# Altium PCB mother.PcbDoc
Units mm, origin at the board's own origin, x right, y up, seen from the top; angles counter-clockwise.
Board outline 232.5 x 170.6 mm, 2 copper layers (Top Layer, Bottom Layer); 95 components, 49 nets, 567 pads, 0 vias.
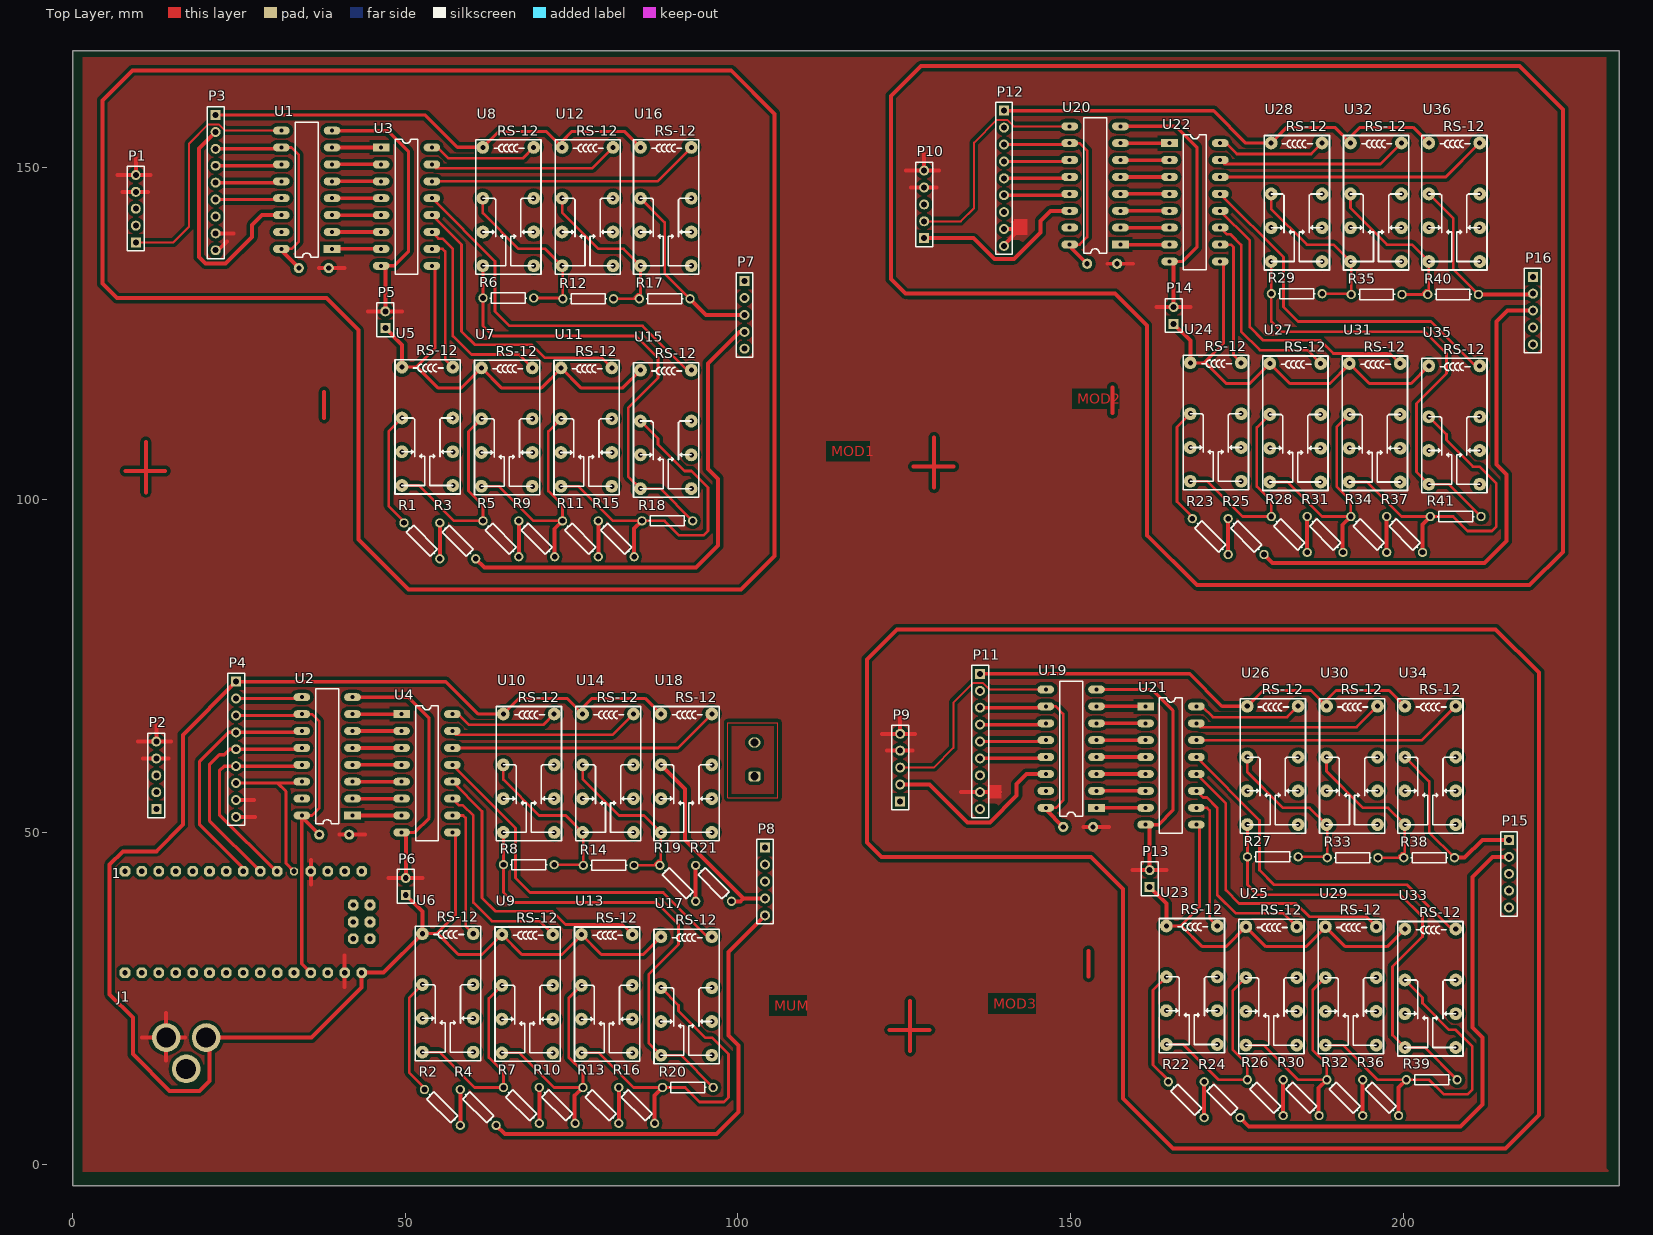
[diagram p0: Top Layer view]
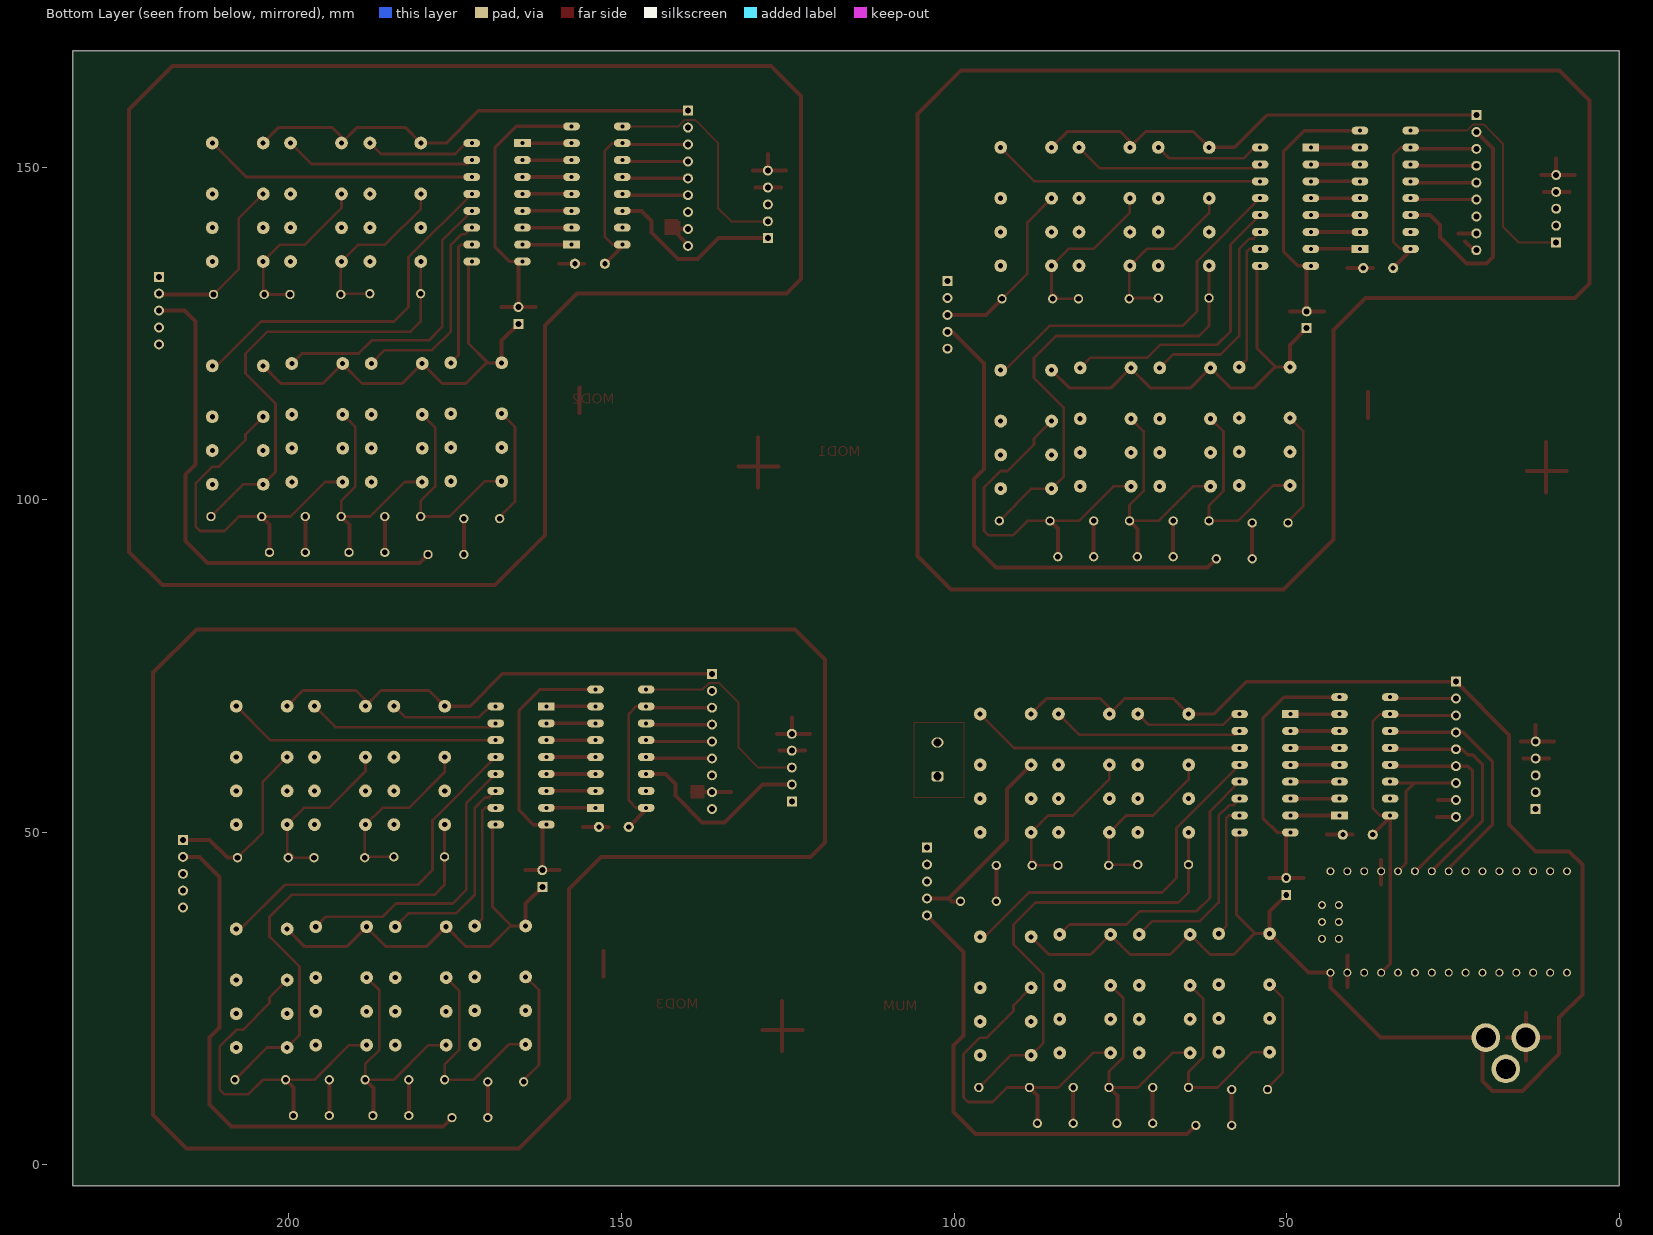
[diagram p1: Bottom Layer view, seen from below]

## Layer stack, top to bottom
Top Solder: solder mask 0.0102, Solder Resist, Dk 3.5
Top Layer: signal copper 0.0356
Dielectric 1: dielectric 0.32, FR-4, Dk 4.8
Bottom Layer: signal copper 0.0356
Bottom Solder: solder mask 0.0102, Solder Resist, Dk 3.5

## Board outline
0,-3.1 232.5,-3.1 232.5,167.5 0,167.5

## Design rules (kind name [scope] priority, off if disabled: settings)
Clearance Clearance_4 [InNamedPolygon('12VGND_L01_P000')] p1: gap=0.5 ignorepadtopadclearanceinfootprint=FALSE except(0: Arc-Hole Track-Hole SMDPad-Hole THPad-Hole Via-Hole Fill-Hole Poly-Hole Region-Hole Text-Hole)
Clearance Clearance_3 [InNamedPolygon('12VGND_L01_P000')] p2: gap=0.39 ignorepadtopadclearanceinfootprint=FALSE except(0: Arc-Hole Track-Hole SMDPad-Hole THPad-Hole Via-Hole Fill-Hole Poly-Hole Region-Hole Text-Hole)
Clearance Clearance_2 [InNamedPolygon('12VGND_L01_P000')] p3: gap=0.38 ignorepadtopadclearanceinfootprint=FALSE except(0: Arc-Hole Track-Hole SMDPad-Hole THPad-Hole Via-Hole Fill-Hole Poly-Hole Region-Hole Text-Hole)
Clearance Clearance_1 [InNamedPolygon('Top Layer-No Net 4')] p4: gap=0.35 ignorepadtopadclearanceinfootprint=FALSE except(0: Arc-Hole Track-Hole SMDPad-Hole THPad-Hole Via-Hole Fill-Hole Poly-Hole Region-Hole Text-Hole)
Clearance widePoLY [InNamedPolygon('12VGND_L01_P000')] p5: gap=0.35 ignorepadtopadclearanceinfootprint=FALSE except(0: Arc-Hole Track-Hole SMDPad-Hole THPad-Hole Via-Hole Fill-Hole Poly-Hole Region-Hole Text-Hole)
Clearance [All] p6: gap=0.254 ignorepadtopadclearanceinfootprint=FALSE except(0: Arc-Hole Track-Hole SMDPad-Hole THPad-Hole Via-Hole Fill-Hole Poly-Hole Region-Hole Text-Hole)
PolygonConnect [All] p1: connectstyle=Relief reliefconductorwidth=0.254 reliefentries=4 polygonreliefangle="90 Angle" airgapwidth=0.254
RoutingVias [All] p1: holewidth=0.711 width=1.27 viastyle="Through Hole" minholewidth=0.711 minwidth=1.27 maxholewidth=0.711 maxwidth=1.27
SolderMaskExpansion [All] p1: expansion=0.102
Width [All] p1: maxlimit=0.6 minlimit=0.128 preferedwidth=0.254 bottomlayer_minwidth=0.254 bottomlayer_maxwidth=0.254 minimp=50.000000 maximp=50.000000 favimp=50.000000
30 further rules are at their usual default settings.

## Components (designator, comment, footprint, x,y, rotation, side; value= is the part's Value field where it differs from the comment)
1 "Arduino Nano" NANO 34.548,39.065 r90 top
J1 "" POWER_JACK_PTH 6.378,19.145 r270 top
P1 "Header 5" HDR1X5 9.5,138.65 r90 top (schematic designator P5)
P2 "Header 5" HDR1X5 12.578,53.485 r90 top (schematic designator P8)
P3 "Header 9" HDR1X9 21.5,157.81 r270 top (schematic designator P4)
P4 "Header 9" HDR1X9 24.578,72.645 r270 top (schematic designator P1)
P5 "Header 2" HDR1X2 47,125.77 r90 top (schematic designator P7)
P6 "Header 2" HDR1X2 50.078,40.605 r90 top (schematic designator P3)
P7 "Header 5" HDR1X5 101,132.85 r270 top (schematic designator P6)
P8 "Header 5" HDR1X5 104.078,47.685 r270 top (schematic designator P2)
P9 "Header 5" HDR1X5 124.4,54.65 r90 top (schematic designator P5)
P10 "Header 5" HDR1X5 128,139.3 r90 top (schematic designator P5)
P11 "Header 9" HDR1X9 136.4,73.81 r270 top (schematic designator P4)
P12 "Header 9" HDR1X9 140,158.46 r270 top (schematic designator P4)
P13 "Header 2" HDR1X2 161.9,41.77 r90 top (schematic designator P7)
P14 "Header 2" HDR1X2 165.5,126.42 r90 top (schematic designator P7)
P15 "Header 5" HDR1X5 215.9,48.85 r270 top (schematic designator P6)
P16 "Header 5" HDR1X5 219.5,133.5 r270 top (schematic designator P6)
R1 "Res1" AXIAL-0.3 52.5,93.81 r315 top value=1K
R2 "Res1" AXIAL-0.3 55.578,8.645 r315 top value=1K (schematic designator R1)
R3 "Res1" AXIAL-0.3 57.888,93.81 r315 top value=1K (schematic designator R1)
R4 "Res1" AXIAL-0.3 60.966,8.645 r315 top value=1K (schematic designator R1)
R5 "Res1" AXIAL-0.3 64.375,94.116 r315 top value=1K (schematic designator R1)
R6 "Res1" AXIAL-0.3 65.5,130.31 r180 top value=1K (schematic designator R14)
R7 "Res1" AXIAL-0.3 67.454,8.951 r315 top value=1K (schematic designator R1)
R8 "Res1" AXIAL-0.3 68.578,45.145 r180 top value=1K (schematic designator R7)
R9 "Res1" AXIAL-0.3 69.764,94.116 r315 top value=1K (schematic designator R1)
R10 "Res1" AXIAL-0.3 72.842,8.951 r315 top value=1K (schematic designator R1)
R11 "Res1" AXIAL-0.3 76.325,94.116 r315 top value=1K (schematic designator R1)
R12 "Res1" AXIAL-0.3 77.5,130.19 r180 top value=1K (schematic designator R13)
R13 "Res1" AXIAL-0.3 79.404,8.951 r315 top value=1K (schematic designator R1)
R14 "Res1" AXIAL-0.3 80.578,45.025 r180 top value=1K (schematic designator R6)
R15 "Res1" AXIAL-0.3 81.714,94.116 r315 top value=1K (schematic designator R1)
R16 "Res1" AXIAL-0.3 84.792,8.951 r315 top value=1K (schematic designator R1)
R17 "Res1" AXIAL-0.3 89,130.19 r180 top value=1K (schematic designator R12)
R18 "Res1" AXIAL-0.3 89.391,96.81 r0 top value=1K (schematic designator R4)
R19 "Res1" AXIAL-0.3 90.962,42.331 r315 top value=1K (schematic designator R1)
R20 "Res1" AXIAL-0.3 92.47,11.645 r0 top value=1K (schematic designator R4)
R21 "Res1" AXIAL-0.3 96.35,42.331 r315 top value=1K (schematic designator R1)
R22 "Res1" AXIAL-0.3 167.4,9.81 r315 top value=1K (schematic designator R1)
R23 "Res1" AXIAL-0.3 171,94.46 r315 top value=1K (schematic designator R1)
R24 "Res1" AXIAL-0.3 172.788,9.81 r315 top value=1K (schematic designator R1)
R25 "Res1" AXIAL-0.3 176.388,94.46 r315 top value=1K (schematic designator R1)
R26 "Res1" AXIAL-0.3 179.275,10.116 r315 top value=1K (schematic designator R1)
R27 "Res1" AXIAL-0.3 180.4,46.31 r180 top value=1K (schematic designator R14)
R28 "Res1" AXIAL-0.3 182.875,94.766 r315 top value=1K (schematic designator R1)
R29 "Res1" AXIAL-0.3 184,130.96 r180 top value=1K (schematic designator R14)
R30 "Res1" AXIAL-0.3 184.664,10.116 r315 top value=1K (schematic designator R1)
R31 "Res1" AXIAL-0.3 188.264,94.766 r315 top value=1K (schematic designator R1)
R32 "Res1" AXIAL-0.3 191.225,10.116 r315 top value=1K (schematic designator R1)
R33 "Res1" AXIAL-0.3 192.4,46.19 r180 top value=1K (schematic designator R13)
R34 "Res1" AXIAL-0.3 194.825,94.766 r315 top value=1K (schematic designator R1)
R35 "Res1" AXIAL-0.3 196,130.84 r180 top value=1K (schematic designator R13)
R36 "Res1" AXIAL-0.3 196.614,10.116 r315 top value=1K (schematic designator R1)
R37 "Res1" AXIAL-0.3 200.214,94.766 r315 top value=1K (schematic designator R1)
R38 "Res1" AXIAL-0.3 203.9,46.19 r180 top value=1K (schematic designator R12)
R39 "Res1" AXIAL-0.3 204.291,12.81 r0 top value=1K (schematic designator R4)
R40 "Res1" AXIAL-0.3 207.5,130.84 r180 top value=1K (schematic designator R12)
R41 "Res1" AXIAL-0.3 207.891,97.46 r0 top value=1K (schematic designator R4)
U1 "74HC595" DIP16 39,137.69 r180 top (schematic designator U11)
U2 "74HC595" DIP16 42.078,52.525 r180 top (schematic designator U1)
U3 "ULN2003" DIP16 46.38,152.93 r0 top (schematic designator U10)
U4 "ULN2003" DIP16 49.458,67.765 r0 top (schematic designator U2)
U5 "RS12L" RS-12 48.45,121.045 r0 top (schematic designator U12)
U6 "RS12L" RS-12 51.528,35.88 r0 top (schematic designator U3)
U7 "RS12L" RS-12 60.4,120.935 r0 top (schematic designator U13)
U8 "RS12L" RS-12 60.61,154.08 r0 top (schematic designator U16)
U9 "RS12L" RS-12 63.478,35.77 r0 top (schematic designator U4)
U10 "RS12L" RS-12 63.688,68.915 r0 top (schematic designator U7)
U11 "RS12L" RS-12 72.35,120.935 r0 top (schematic designator U14)
U12 "RS12L" RS-12 72.531,154.08 r0 top (schematic designator U17)
U13 "RS12L" RS-12 75.428,35.77 r0 top (schematic designator U5)
U14 "RS12L" RS-12 75.61,68.915 r0 top (schematic designator U8)
U15 "RS12L" RS-12 84.3,120.585 r0 top
U16 "RS12L" RS-12 84.3,154.08 r0 top (schematic designator U18)
U17 "RS12L" RS-12 87.378,35.42 r0 top (schematic designator U6)
U18 "RS12L" RS-12 87.378,68.915 r0 top (schematic designator U9)
U19 "74HC595" DIP16 153.9,53.69 r180 top (schematic designator U11)
U20 "74HC595" DIP16 157.5,138.34 r180 top (schematic designator U11)
U21 "ULN2003" DIP16 161.28,68.93 r0 top (schematic designator U10)
U22 "ULN2003" DIP16 164.88,153.58 r0 top (schematic designator U10)
U23 "RS12L" RS-12 163.35,37.045 r0 top (schematic designator U12)
U24 "RS12L" RS-12 166.95,121.695 r0 top (schematic designator U12)
U25 "RS12L" RS-12 175.3,36.935 r0 top (schematic designator U13)
U26 "RS12L" RS-12 175.51,70.08 r0 top (schematic designator U16)
U27 "RS12L" RS-12 178.9,121.585 r0 top (schematic designator U13)
U28 "RS12L" RS-12 179.11,154.73 r0 top (schematic designator U16)
U29 "RS12L" RS-12 187.25,36.935 r0 top (schematic designator U14)
U30 "RS12L" RS-12 187.431,70.08 r0 top (schematic designator U17)
U31 "RS12L" RS-12 190.85,121.585 r0 top (schematic designator U14)
U32 "RS12L" RS-12 191.031,154.73 r0 top (schematic designator U17)
U33 "RS12L" RS-12 199.2,36.585 r0 top (schematic designator U15)
U34 "RS12L" RS-12 199.2,70.08 r0 top (schematic designator U18)
U35 "RS12L" RS-12 202.8,121.235 r0 top (schematic designator U15)
U36 "RS12L" RS-12 202.8,154.73 r0 top (schematic designator U18)

## Footprints (in the part's own frame and the unit in brackets; to place one, negate y for a bottom-side part, rotate by r counter-clockwise, add the part's x,y. Pads: shape width x height; smd on the part's side, far side on the other; paste and mask are expansions set on the pad)
AXIAL-0.3 [mm] "Axial Device, Thru-Hole; 2 Leads; 0.3 in Pin Spacing"
  round 1.4 hole 0.85: 1(-3.81,0) 2(3.81,0)
  silkscreen extent -2.77,-0.76 2.77,0.76
DIP16 [mm]
  rect 2.5x1.2 hole 0.6: 1(0,0)
  oval 2.5x1.2 hole 0.6: 2(0,-2.54) 3(0,-5.08) 4(0,-7.62) 5(0,-10.16) 6(0,-12.7) 7(0,-15.24) 8(0,-17.78) 9(7.62,-17.78) 10(7.62,-15.24) 11(7.62,-12.7) 12(7.62,-10.16) 13(7.62,-7.62) 14(7.62,-5.08) 15(7.62,-2.54) 16(7.62,0)
  silkscreen extent 2.08,-19.05 5.54,1.27
HDR1X2 [mm] "Connector; Header; 2 Position"
  rect 1.5x1.5 hole 0.9: 1(0,0)
  round 1.5 hole 0.9: 2(2.54,0)
  silkscreen extent -1.27,-1.27 3.81,1.27
HDR1X5 [mm] "Connector; Header; 5 Position"
  rect 1.5x1.5 hole 0.9: 1(0,0)
  round 1.5 hole 0.9: 2(2.54,0) 3(5.08,0) 4(7.62,0) 5(10.16,0)
  silkscreen extent -1.27,-1.27 11.43,1.27
HDR1X9 [mm] "Connector; Header; 9 Position"
  rect 1.5x1.5 hole 0.9: 1(0,0)
  round 1.5 hole 0.9: 2(2.54,0) 3(5.08,0) 4(7.62,0) 5(10.16,0) 6(12.7,0) 7(15.24,0) 8(17.78,0) 9(20.32,0)
  silkscreen extent -1.27,-1.27 21.59,1.27
NANO [mm]
  oct 1.6x1.6 / inner round 1.524 / far side round 1.2 hole 0.8: 3.3V(-10.16,24.13) 5V(-10.16,-1.27) A0(-10.16,19.05) A1(-10.16,16.51) A2(-10.16,13.97) A3(-10.16,11.43) A4(-10.16,8.89) A5(-10.16,6.35) A6(-10.16,3.81) A7(-10.16,1.27) AREF(-10.16,21.59) D3(5.08,3.81) D4(5.08,6.35) D5(5.08,8.89) D6(5.08,11.43) D7(5.08,13.97) D8(5.08,16.51) D9(5.08,19.05) D10(5.08,21.59) D11(5.08,24.13) D12(5.08,26.67) D13(-10.16,26.67) GND(-10.16,-6.35) GND1(5.08,-1.27) ICSP1(-5.08,-10.16) ICSP2(-5.08,-7.62) ICSP3(-2.54,-10.16) ICSP4(-2.54,-7.62) ICSP5(0,-10.16) ICSP6(0,-7.62) RAW(-10.16,-8.89) RST(-10.16,-3.81) RST1(5.08,-3.81) RX1(5.08,-6.35) TX0(5.08,-8.89)
  oct 1.2x1.2 / inner round 1.524 / far side round 1.2 hole 0.8: D2(5.08,1.27)
POWER_JACK_PTH [mil]
  round 170 / inner round 60 / far side round 170 hole 118: GND(0,303.15) GNDBREAK(185.04,421.26) PWR(0,539.37)
RS-12 [mm]
  round 1.924 hole 0.762: 1(1.05,-1.125) 4(1.05,-8.775) 6(1.05,-13.85) 8(1.05,-18.925) 9(8.7,-18.925) 11(8.7,-13.85) 13(8.7,-8.775) 16(8.7,-1.125)
  silkscreen extent 0,-20.2 9.8,0, body extent 3.05,-2.79 3.05,-2.79, height 0.25

## Part data
1: library part NANO, DeviceSetName=NANO, GateName_1=G$1, LibraryName=Arduino-clone, Package=NANO, SymbolName_1=NANO
J1: library part POWER_JACK, Package=POWER_JACK_PTH, DeviceSetName=POWER_JACK, GateName_1=G$1, LibraryName=SparkFun-Connectors, PROD_ID=CONN-08197, SymbolName_1=POWERJACK
P1 P2 P7 P8 P9 P10 P15 P16: "Header, 5-Pin", LatestRevisionDate=17-Jul-2002, LatestRevisionNote="Re-released for DXP Platform.", Publisher="Altium Limited"
P3 P4 P11 P12: "Header, 9-Pin", LatestRevisionDate=17-Jul-2002, LatestRevisionNote="Re-released for DXP Platform.", Publisher="Altium Limited"
P5 P6 P13 P14: "Header, 2-Pin", LatestRevisionDate=17-Jul-2002, LatestRevisionNote="Re-released for DXP Platform.", Publisher="Altium Limited"
R1 R2 R3 R4 R5 R6 R7 R8 R9 R10 R11 R12 R13 R14 R15 R16 R17 R18 R19 R20 R21 R22 R23 R24 R25 R26 R27 R28 R29 R30 R31 R32 R33 R34 R35 R36 R37 R38 R39 R40 R41: "Resistor", LatestRevisionDate=17-Jul-2002, LatestRevisionNote="Re-released for DXP Platform.", PackageDescription="Axial Device, Thru-Hole; 2 Leads; 0.3 in Pin Spacing", PackageReference=AXIAL-0.3, Published=8-Jun-2000, Publisher="Altium Limited"

## Free pads (board coordinates)
  round 1.524 hole 0.762: 17(34,134.81) 17(37.078,49.645) 17(148.9,50.81) 17(152.5,135.46) 18(38.5,134.81) 18(41.578,49.645) 18(153.4,50.81) 18(157,135.46)
  oval 1.824x1.524 hole 1.262: 19(102.5,63.5)
  rrect50% 1.824x1.524 hole 1.262: 20(102.5,58.415)

## Nets (pads, with @x,y where several pads share a name; then routed paths per layer and width w, separated by ;. In a path a pad name is that pad's centre, name@x,y a point inside that pad or via, vN(x,y) a via of type N, cw(c..) or ccw(c..) an arc to the next point about the centre after c; other vN are vias at no path point)
5V: 
12V: 
12VGND: 
CLK: 
DATA: 
DAUG1Q*: 
DAUG2Q*: 
DAUG3Q*: 
EN: 
LATCH: 
MUMQ*: 
NetR1_2: 
NetR2_2: 
NetR3_2: 
NetR4_2: 
NetR5_2: 
NetR6_2: 
NetR8_2: 
NetR9_2: 
NetR10_2: 
NetR11_2: 
NetR12_2: 
NetR13_2: 
NetU1_1: 
NetU1_2: 
NetU1_3: 
NetU1_4: 
NetU1_5: 
NetU1_6: 
NetU1_7: 
NetU10_1: 
NetU10_2: 
NetU10_3: 
NetU10_4: 
NetU10_5: 
NetU10_6: 
NetU10_7: 
T1: 
T2: 
T3: 
T4: 
T5: 
T6: 
T7: 
TERMA: 
TERMB: 
TERMC: 
TERMD: 
TERME: 
pads on no net: 1.3.3V 1.5V 1.A0 1.A1 1.A2 1.A3 1.A4 1.A5 1.A6 1.A7 1.AREF 1.D2 1.D3 1.D4 1.D5 1.D6 1.D7 1.D8 1.D9 1.D10 1.D11 1.D12 1.D13 1.GND 1.GND1 1.ICSP1 1.ICSP2 1.ICSP3 1.ICSP4 1.ICSP5 1.ICSP6 1.RAW 1.RST 1.RST1 1.RX1 1.TX0 J1.GND J1.GNDBREAK J1.PWR P1.1 P1.2 P1.3 P1.4 P1.5 P2.1 P2.2 P2.3 P2.4 P2.5 P3.1 P3.2 P3.3 P3.4 P3.5 P3.6 P3.7 P3.8 P3.9 P4.1 P4.2 P4.3 P4.4 P4.5 P4.6 P4.7 P4.8 P4.9 P5.1 P5.2 P6.1 P6.2 P7.1 P7.2 P7.3 P7.4 P7.5 P8.1 P8.2 P8.3 P8.4 P8.5 P9.1 P9.2 P9.3 P9.4 P9.5 P10.1 P10.2 P10.3 P10.4 P10.5 P11.1 P11.2 P11.3 P11.4 P11.5 P11.6 P11.7 P11.8 P11.9 P12.1 P12.2 P12.3 P12.4 P12.5 P12.6 P12.7 P12.8 P12.9 P13.1 P13.2 P14.1 P14.2 P15.1 P15.2 P15.3 P15.4 P15.5 P16.1 P16.2 P16.3 P16.4 P16.5 R1.1 R1.2 R2.1 R2.2 R3.1 R3.2 R4.1 R4.2 R5.1 R5.2 R6.1 R6.2 R7.1 R7.2 R8.1 R8.2 R9.1 R9.2 R10.1 R10.2 R11.1 R11.2 R12.1 R12.2 R13.1 R13.2 R14.1 R14.2 R15.1 R15.2 R16.1 R16.2 R17.1 R17.2 R18.1 R18.2 R19.1 R19.2 R20.1 R20.2 R21.1 R21.2 R22.1 R22.2 R23.1 R23.2 R24.1 R24.2 R25.1 R25.2 R26.1 R26.2 R27.1 R27.2 R28.1 R28.2 R29.1 R29.2 R30.1 R30.2 R31.1 R31.2 R32.1 R32.2 R33.1 R33.2 R34.1 R34.2 R35.1 R35.2 R36.1 R36.2 R37.1 R37.2 R38.1 R38.2 R39.1 R39.2 R40.1 R40.2 R41.1 R41.2 U1.1 U1.2 U1.3 U1.4 U1.5 U1.6 U1.7 U1.8 U1.9 U1.10 U1.11 U1.12 U1.13 U1.14 U1.15 U1.16 U2.1 U2.2 U2.3 U2.4 U2.5 U2.6 U2.7 U2.8 U2.9 U2.10 U2.11 U2.12 U2.13 U2.14 U2.15 U2.16 U3.1 U3.2 U3.3 U3.4 U3.5 U3.6 U3.7 U3.8 U3.9 U3.10 U3.11 U3.12 U3.13 U3.14 U3.15 U3.16 U4.1 U4.2 U4.3 U4.4 U4.5 U4.6 U4.7 U4.8 U4.9 U4.10 U4.11 U4.12 U4.13 U4.14 U4.15 U4.16 U5.1 U5.4 U5.6 U5.8 U5.9 U5.11 U5.13 U5.16 U6.1 U6.4 U6.6 U6.8 U6.9 U6.11 U6.13 U6.16 U7.1 U7.4 U7.6 U7.8 U7.9 U7.11 U7.13 U7.16 U8.1 U8.4 U8.6 U8.8 U8.9 U8.11 U8.13 U8.16 U9.1 U9.4 U9.6 U9.8 U9.9 U9.11 U9.13 U9.16 U10.1 U10.4 U10.6 U10.8 U10.9 U10.11 U10.13 U10.16 U11.1 U11.4 U11.6 U11.8 U11.9 U11.11 U11.13 U11.16 U12.1 U12.4 U12.6 U12.8 U12.9 U12.11 U12.13 U12.16 U13.1 U13.4 U13.6 U13.8 U13.9 U13.11 U13.13 U13.16 U14.1 U14.4 U14.6 U14.8 U14.9 U14.11 U14.13 U14.16 U15.1 U15.4 U15.6 U15.8 U15.9 U15.11 U15.13 U15.16 U16.1 U16.4 U16.6 U16.8 U16.9 U16.11 U16.13 U16.16 U17.1 U17.4 U17.6 U17.8 U17.9 U17.11 U17.13 U17.16 U18.1 U18.4 U18.6 U18.8 U18.9 U18.11 U18.13 U18.16 U19.1 U19.2 U19.3 U19.4 U19.5 U19.6 U19.7 U19.8 U19.9 U19.10 U19.11 U19.12 U19.13 U19.14 U19.15 U19.16 U20.1 U20.2 U20.3 U20.4 U20.5 U20.6 U20.7 U20.8 U20.9 U20.10 U20.11 U20.12 U20.13 U20.14 U20.15 U20.16 U21.1 U21.2 U21.3 U21.4 U21.5 U21.6 U21.7 U21.8 U21.9 U21.10 U21.11 U21.12 U21.13 U21.14 U21.15 U21.16 U22.1 U22.2 U22.3 U22.4 U22.5 U22.6 U22.7 U22.8 U22.9 U22.10 U22.11 U22.12 U22.13 U22.14 U22.15 U22.16 U23.1 U23.4 U23.6 U23.8 U23.9 U23.11 U23.13 U23.16 U24.1 U24.4 U24.6 U24.8 U24.9 U24.11 U24.13 U24.16 U25.1 U25.4 U25.6 U25.8 U25.9 U25.11 U25.13 U25.16 U26.1 U26.4 U26.6 U26.8 U26.9 U26.11 U26.13 U26.16 U27.1 U27.4 U27.6 U27.8 U27.9 U27.11 U27.13 U27.16 U28.1 U28.4 U28.6 U28.8 U28.9 U28.11 U28.13 U28.16 U29.1 U29.4 U29.6 U29.8 U29.9 U29.11 U29.13 U29.16 U30.1 U30.4 U30.6 U30.8 U30.9 U30.11 U30.13 U30.16 U31.1 U31.4 U31.6 U31.8 U31.9 U31.11 U31.13 U31.16 U32.1 U32.4 U32.6 U32.8 U32.9 U32.11 U32.13 U32.16 U33.1 U33.4 U33.6 U33.8 U33.9 U33.11 U33.13 U33.16 U34.1 U34.4 U34.6 U34.8 U34.9 U34.11 U34.13 U34.16 U35.1 U35.4 U35.6 U35.8 U35.9 U35.11 U35.13 U35.16 U36.1 U36.4 U36.6 U36.8 U36.9 U36.11 U36.13 U36.16
copper on no net: | length 5328.5
  Top Layer w0.125: 98.5,55.23 98.5,66.5 106,66.5 106,55.23 98.5,55.23
  Top Layer w0.3: 9.5,138.65 15.15,138.65 17.5,141 17.5,153.5 20.424,156.424 21.978,156.424 22.932,155.47 31.38,155.47 ; 124.4,59.73 129.44,59.73 132.4,62.69 132.4,69.5 135.324,72.424 136.878,72.424 137.832,71.47 146.28,71.47 ; 128,141.84 133.5,141.84 135.5,143.84 135.5,153.65 138.924,157.074 140.478,157.074 141.432,156.12 149.88,156.12
  Top Layer w0.4: 31.38,137.69 32.88,137.69 34,138.81 34,151.81 32.88,152.93 31.38,152.93 ; 34.378,67.685 34.458,67.765 35.958,67.765 37.078,66.645 37.078,53.645 35.958,52.525 34.458,52.525 ; 49.5,102.12 52.041,102.12 57.351,96.81 61.681,96.81 61.681,99.129 59.5,101.31 59.5,110.21 61.45,112.16 ; 49.5,112.27 47.5,110.27 47.5,99.041 49.731,96.81 ; 52.578,16.955 55.12,16.955 60.43,11.645 64.76,11.645 64.76,13.964 62.578,16.145 62.578,25.045 64.528,26.995 ; 52.578,27.105 50.578,25.105 50.578,13.876 52.81,11.645 ; 54,137.69 55.62,137.69 56,137.31 56,121.07 57.15,119.92 ; 54,140.23 55,139.23 55.58,139.23 57.15,137.66 57.15,124.61 59.95,121.81 67.1,121.81 69.1,119.81 ; 54,142.77 58.45,138.32 58.45,125.31 60.45,123.31 69,123.31 71,121.31 79.55,121.31 81.05,119.81 ; 54,145.31 63.5,135.81 63.5,128.31 65.69,126.12 85.69,126.12 92.35,119.46 ; 54,147.85 87.895,147.85 93,152.955 ; 54.58,149.81 78.086,149.81 81.231,152.955 ; 54.88,152.93 56.5,151.31 67.665,151.31 69.31,152.955 ; 57.078,52.525 58.698,52.525 59.078,52.145 59.078,35.905 60.228,34.755 ; 57.078,55.065 58.078,54.065 58.658,54.065 60.228,52.495 60.228,39.445 63.028,36.645 70.178,36.645 72.178,34.645 ; 57.078,57.605 61.528,53.155 61.528,40.145 63.528,38.145 72.078,38.145 74.078,36.145 82.628,36.145 84.128,34.645 ; 57.078,60.145 66.578,50.645 66.578,43.145 68.768,40.955 88.768,40.955 95.428,34.295 96.078,34.295 ; 57.078,62.685 90.973,62.685 96.078,67.79 ; 57.078,65.225 57.658,64.645 81.165,64.645 84.31,67.79 ; 57.078,67.765 57.958,67.765 59.578,66.145 70.743,66.145 72.388,67.79 ; 61.45,102.01 64.101,102.01 69.301,96.81 73.631,96.81 73.631,99.179 71.5,101.31 71.5,110.26 73.4,112.16 ; 61.66,145.305 61.66,143.07 67.04,137.69 71.046,137.69 73.581,135.155 ; 61.69,134.266 61.69,130.31 61.69,126.12 63.2,124.61 84.7,124.61 88,121.31 88,118.31 83.5,113.81 83.5,103.51 85.35,101.66 88.351,101.66 93.201,96.81 ; 64.528,16.845 67.18,16.845 72.38,11.645 76.71,11.645 76.71,14.014 74.578,16.145 74.578,25.095 76.478,26.995 ; 64.738,49.101 64.768,49.101 64.768,45.145 64.768,40.955 66.278,39.445 87.778,39.445 91.078,36.145 91.078,33.145 86.578,28.645 86.578,18.345 88.428,16.495 91.43,16.495 96.28,11.645 ; 64.738,60.14 64.738,57.905 70.118,52.525 74.125,52.525 76.66,49.99 76.768,49.881 76.768,45.025 76.648,45.145 72.388,45.145 ; 69.31,130.31 73.57,130.31 ; 73.4,102.01 76.051,102.01 81.251,96.81 85.581,96.81 89,96.81 91.177,94.633 94.823,94.633 95.5,95.31 95.5,101.81 ; 73.581,145.305 73.581,143.179 79.07,137.69 82.815,137.69 85.35,135.155 85.35,130.963 85.231,130.844 ; 73.69,130.19 73.69,135.046 ; 76.478,16.845 79.13,16.845 84.33,11.645 88.66,11.645 92.078,11.645 94.255,9.468 97.901,9.468 98.578,10.145 98.578,16.645 96.078,19.145 95.078,19.145 91.078,23.145 91.078,23.995 88.428,26.645 ; 76.66,60.14 76.66,58.014 82.148,52.525 85.893,52.525 88.428,49.99 88.428,45.798 88.31,45.679 ; 81.31,130.19 84.536,130.19 ; 84.388,45.025 87.614,45.025 87.614,45.296 87.997,45.679 88.268,45.679 ; 84.536,130.461 84.919,130.844 85.19,130.844 ; 85.35,111.81 88,109.16 88,108.31 92,104.31 93,104.31 95.5,101.81 ; 85.35,145.305 89,141.655 89,134 92.81,130.19 ; 88.268,45.025 88.31,45.025 ; 95.5,95.81 95.5,101.81 ; 146.28,53.69 147.78,53.69 148.9,54.81 148.9,67.81 147.78,68.93 146.28,68.93 ; 149.88,138.34 151.38,138.34 152.5,139.46 152.5,152.46 151.38,153.58 149.88,153.58 ; 164.4,18.12 166.941,18.12 172.251,12.81 176.581,12.81 176.581,15.129 174.4,17.31 174.4,26.21 176.35,28.16 ; 164.4,28.27 162.4,26.27 162.4,15.041 164.631,12.81 ; 168,102.77 170.541,102.77 175.851,97.46 180.181,97.46 180.181,99.779 178,101.96 178,110.86 179.95,112.81 ; 168,112.92 166,110.92 166,99.691 168.231,97.46 ; 168.9,53.69 170.52,53.69 170.9,53.31 170.9,37.07 172.05,35.92 ; 168.9,56.23 169.9,55.23 170.48,55.23 172.05,53.66 172.05,40.61 174.85,37.81 182,37.81 184,35.81 ; 168.9,58.77 173.35,54.32 173.35,41.31 175.35,39.31 183.9,39.31 185.9,37.31 194.45,37.31 195.95,35.81 ; 168.9,61.31 178.4,51.81 178.4,44.31 180.59,42.12 200.59,42.12 207.25,35.46 ; 168.9,63.85 202.795,63.85 207.9,68.955 ; 169.48,65.81 192.986,65.81 196.131,68.955 ; 169.78,68.93 171.4,67.31 182.565,67.31 184.21,68.955 ; 172.5,138.34 174.12,138.34 174.5,137.96 174.5,121.72 175.65,120.57 ; 172.5,140.88 173.5,139.88 174.08,139.88 175.65,138.31 175.65,125.26 178.45,122.46 185.6,122.46 187.6,120.46 ; 172.5,143.42 176.95,138.97 176.95,125.96 178.95,123.96 187.5,123.96 189.5,121.96 198.05,121.96 199.55,120.46 ; 172.5,145.96 182,136.46 182,128.96 184.19,126.77 204.19,126.77 210.85,120.11 ; 172.5,148.5 206.395,148.5 211.5,153.605 ; 173.08,150.46 196.586,150.46 199.731,153.605 ; 173.38,153.58 175,151.96 186.165,151.96 187.81,153.605 ; 176.35,18.01 179.001,18.01 184.201,12.81 188.531,12.81 188.531,15.179 186.4,17.31 186.4,26.26 188.3,28.16 ; 176.56,61.305 176.56,59.07 181.94,53.69 185.946,53.69 188.481,51.155 ; 176.59,50.266 176.59,46.31 176.59,42.12 178.1,40.61 199.6,40.61 202.9,37.31 202.9,34.31 198.4,29.81 198.4,19.51 200.25,17.66 203.251,17.66 208.101,12.81 ; 179.95,102.66 182.601,102.66 187.801,97.46 192.131,97.46 192.131,99.829 190,101.96 190,110.91 191.9,112.81 ; 180.16,145.955 180.16,143.72 185.54,138.34 189.546,138.34 192.081,135.805 ; 180.19,134.916 180.19,130.96 180.19,126.77 181.7,125.26 203.2,125.26 206.5,121.96 206.5,118.96 202,114.46 202,104.16 203.85,102.31 206.851,102.31 211.701,97.46 ; 184.21,46.31 188.47,46.31 ; 187.81,130.96 192.07,130.96 ; 188.3,18.01 190.951,18.01 196.151,12.81 200.481,12.81 203.9,12.81 206.077,10.633 209.723,10.633 210.4,11.31 210.4,17.81 207.9,20.31 206.9,20.31 202.9,24.31 202.9,25.16 200.25,27.81 ; 188.481,61.305 188.481,59.179 193.97,53.69 197.715,53.69 200.25,51.155 200.25,46.963 200.131,46.844 ; 188.59,46.19 188.59,51.046 ; 191.9,102.66 194.551,102.66 199.751,97.46 204.081,97.46 207.5,97.46 209.677,95.283 213.323,95.283 214,95.96 214,102.46 211.5,104.96 210.5,104.96 206.5,108.96 206.5,109.81 203.85,112.46 ; 192.081,145.955 192.081,143.829 197.57,138.34 201.315,138.34 203.85,135.805 203.85,131.613 203.731,131.494 ; 192.19,130.84 192.19,135.696 ; 196.21,46.19 199.436,46.19 ; 199.436,46.461 199.819,46.844 200.09,46.844 ; 199.81,130.84 203.036,130.84 ; 200.25,61.305 203.9,57.655 203.9,50 207.71,46.19 ; 203.036,131.111 203.419,131.494 203.69,131.494 ; 203.85,145.955 207.5,142.305 207.5,134.65 211.31,130.84
  Top Layer w0.45: 49.5,119.92 51.61,119.92 54.5,122.81 54.5,134.65 ; 51.79,119.92 54.9,116.81 58.45,116.81 61.45,119.81 64.45,116.81 70.5,116.81 73.4,119.71 ; 52.578,34.755 54.688,34.755 ; 57.078,49.985 57.578,49.485 57.578,37.645 54.688,34.755 ; 61.66,152.955 64.015,155.31 71.226,155.31 73.581,152.955 ; 64.738,67.79 67.093,70.145 74.305,70.145 76.66,67.79 76.66,68.726 78.078,70.145 86.073,70.145 88.428,67.79 ; 73.4,119.81 76.4,116.81 82.7,116.81 85.35,119.46 ; 73.581,153.891 75,155.31 82.995,155.31 85.35,152.955 ; 88.428,34.295 85.778,31.645 79.478,31.645 76.478,34.645 76.478,34.545 73.578,31.645 67.528,31.645 64.528,34.645 61.528,31.645 57.978,31.645 54.868,34.755 54.688,34.755 ; 164.4,35.92 166.51,35.92 169.4,38.81 169.4,50.65 ; 166.69,35.92 169.8,32.81 173.35,32.81 176.35,35.81 179.35,32.81 185.4,32.81 188.3,35.71 ; 168,120.57 170.11,120.57 173,123.46 173,135.3 ; 170.29,120.57 173.4,117.46 176.95,117.46 179.95,120.46 182.95,117.46 189,117.46 191.9,120.36 ; 176.56,68.955 178.915,71.31 186.126,71.31 188.481,68.955 ; 180.16,153.605 182.515,155.96 189.726,155.96 192.081,153.605 ; 188.3,35.81 191.3,32.81 197.6,32.81 200.25,35.46 ; 188.481,69.891 189.9,71.31 197.895,71.31 200.25,68.955 ; 191.9,120.46 194.9,117.46 201.2,117.46 203.85,120.11 ; 192.081,154.541 193.5,155.96 201.495,155.96 203.85,153.605
  Top Layer w0.5: 21.5,145.11 31.18,145.11 ; 21.5,147.65 31.18,147.65 ; 21.5,150.19 31.18,150.19 ; 21.5,152.73 31.18,152.73 ; 21.5,157.81 53,157.81 57.855,152.955 61.66,152.955 ; 24.578,57.405 30.818,57.405 ; 24.578,67.565 34.258,67.565 34.378,67.685 ; 24.578,70.105 34.258,70.105 34.458,70.305 ; 24.578,72.645 56.078,72.645 60.933,67.79 64.738,67.79 ; 25.658,44.145 25.658,44.565 19.078,51.145 19.078,60.645 23.458,65.025 24.578,65.025 34.258,65.025 34.378,65.145 ; 28.198,44.145 20.578,51.765 20.578,60.145 22.078,61.645 22.778,61.645 23.618,62.485 24.578,62.485 34.258,62.485 34.378,62.605 ; 30.738,44.145 30.578,44.145 22.078,52.645 22.078,59.245 22.778,59.945 24.578,59.945 34.258,59.945 34.378,60.065 ; 33.278,44.145 32.078,45.345 32.078,56.145 30.818,57.405 ; 34.378,57.525 34.258,57.405 30.818,57.405 ; 34.458,52.265 34.458,30.265 35.818,28.905 ; 39,155.47 47.34,155.47 50.5,152.31 50.5,137.31 48.34,135.15 46.38,135.15 ; 42.078,70.305 50.418,70.305 53.578,67.145 53.578,52.145 51.418,49.985 49.458,49.985 ; 136.4,61.11 146.08,61.11 ; 136.4,63.65 146.08,63.65 ; 136.4,66.19 146.08,66.19 ; 136.4,68.73 146.08,68.73 ; 136.4,73.81 167.9,73.81 172.755,68.955 176.56,68.955 ; 140,145.76 149.68,145.76 ; 140,148.3 149.68,148.3 ; 140,150.84 149.68,150.84 ; 140,153.38 149.68,153.38 ; 140,158.46 171.5,158.46 176.355,153.605 180.16,153.605 ; 153.9,71.47 162.24,71.47 165.4,68.31 165.4,53.31 163.24,51.15 161.28,51.15 ; 157.5,156.12 165.84,156.12 169,152.96 169,137.96 166.84,135.8 164.88,135.8
  Top Layer w0.55: 34.378,57.525 34.458,57.605 ; 34.378,60.065 34.458,60.145 ; 34.378,62.605 34.458,62.685 ; 34.378,65.145 34.458,65.225 ; 39,137.69 46.38,137.69 ; 39,140.23 46.38,140.23 ; 39,142.77 46.38,142.77 ; 39,145.31 46.38,145.31 ; 39,147.85 46.38,147.85 ; 39,150.39 46.38,150.39 ; 39,152.93 46.38,152.93 ; 42.078,52.525 49.458,52.525 ; 42.078,55.065 49.458,55.065 ; 42.078,57.605 49.458,57.605 ; 42.078,60.145 49.458,60.145 ; 42.078,62.685 49.458,62.685 ; 42.078,65.225 49.458,65.225 ; 42.078,67.765 49.458,67.765 ; 153.9,53.69 161.28,53.69 ; 153.9,56.23 161.28,56.23 ; 153.9,58.77 161.28,58.77 ; 153.9,61.31 161.28,61.31 ; 153.9,63.85 161.28,63.85 ; 153.9,66.39 161.28,66.39 ; 153.9,68.93 161.28,68.93 ; 157.5,138.34 164.88,138.34 ; 157.5,140.88 164.88,140.88 ; 157.5,143.42 164.88,143.42 ; 157.5,145.96 164.88,145.96 ; 157.5,148.5 164.88,148.5 ; 157.5,151.04 164.88,151.04 ; 157.5,153.58 164.88,153.58
  Top Layer w0.6: 6.69,130.31 4.5,132.5 4.5,160 9,164.5 99,164.5 105.5,158 105.5,91.5 100.5,86.5 50.5,86.5 43,94 43,125.5 38.19,130.31 7,130.31 ; 6.735,148.81 11.702,148.81 ; 7.497,146.27 9.5,146.27 11.347,146.27 ; 7.922,104.31 11,104.31 ; 9.5,148.81 9.5,151.291 ; 9.813,63.645 14.78,63.645 12.578,63.645 12.578,66.126 ; 10.418,19.145 14.078,19.145 ; 10.575,61.105 12.578,61.105 14.425,61.105 ; 11,101.106 11,104.31 ; 11,108.665 11,104.31 ; 13.922,104.31 11,104.31 ; 14.078,15.734 14.078,19.145 ; 14.078,22.862 14.078,19.145 ; 16.933,19.145 14.078,19.145 ; 20.078,19.145 20.578,19.145 ; 21.5,137.49 21.884,137.49 23.204,138.81 ; 21.5,140.03 24.222,140.03 ; 21.5,155.27 19,152.77 19,136.5 20,135.5 23,135.5 27,139.5 27,141.27 28.5,142.77 31.38,142.77 ; 24.578,52.325 27.415,52.325 ; 24.578,54.865 27.3,54.865 ; 24.578,72.645 16.578,64.645 16.578,51.145 12.578,47.145 7.578,47.145 5.578,45.145 5.578,25.645 9.078,22.145 9.078,16.645 14.578,11.145 19.078,11.145 20.578,12.645 20.578,19.145 ; 31.38,137.43 34,134.81 ; 34.458,52.525 34.458,52.265 37.078,49.645 ; 35.818,43.95 35.818,44.145 ; 35.818,44.512 35.818,44.145 ; 35.818,45.818 35.818,42.137 35.818,44.145 ; 37.038,134.81 38.5,134.81 40.869,134.81 ; 37.82,112.299 37.82,116.165 ; 40.116,49.645 41.578,49.645 43.947,49.645 ; 40.898,28.905 40.898,26.723 40.898,31.47 ; 44.422,128.31 47,128.31 ; 47,125.77 49.5,123.27 49.5,119.92 ; 47,134.53 47,128.31 ; 47.5,43.145 50.078,43.145 ; 49.458,49.985 50.078,49.365 50.078,43.145 ; 49.5,128.31 47,128.31 ; 50.078,40.605 52.578,38.105 52.578,34.755 46.728,28.905 43.438,28.905 43.438,26.645 35.938,19.145 20.578,19.145 ; 52.578,43.145 50.078,43.145 ; 55.194,91.116 55.194,96.504 ; 58.272,5.951 58.272,11.339 ; 60.582,91.116 61.888,89.81 93.694,89.81 97,93.116 97,94.633 ; 63.66,5.951 64.966,4.645 96.772,4.645 100.078,7.951 100.078,9.468 ; 67.07,91.422 67.07,96.81 ; 70.148,6.257 70.148,11.645 ; 72.4,91.48 72.4,95.579 73.631,96.81 ; 75.478,6.315 75.478,10.414 76.71,11.645 ; 79.02,91.422 79.02,96.81 ; 82.098,6.257 82.098,11.645 ; 84.408,91.422 84.408,95.636 85.581,96.81 ; 87.486,6.257 87.486,10.471 88.66,11.645 ; 88.428,60.14 92.078,56.49 92.078,48.835 95.888,45.025 100.848,40.065 ; 92.81,130.19 95.23,127.77 101,127.77 ; 93.656,39.637 93.656,45.025 ; 99.044,39.637 100.42,39.637 100.848,40.065 ; 100.078,9.145 100.078,17.972 98.578,19.472 98.578,32.025 104.078,37.525 ; 101,125.23 100.23,125.23 95.5,120.5 95.5,104.637 97,103.137 ; 104.078,40.065 100.848,40.065 ; 121.59,46.31 119.4,48.5 119.4,76 123.9,80.5 213.9,80.5 220.4,74 220.4,7.5 215.4,2.5 165.4,2.5 157.9,10 157.9,41.5 153.09,46.31 121.9,46.31 ; 121.635,64.81 126.602,64.81 ; 122.397,62.27 124.4,62.27 126.247,62.27 ; 122.822,20.31 125.9,20.31 ; 124.4,57.19 128.81,57.19 134.5,51.5 137.9,51.5 141.9,55.5 141.9,57.27 143.4,58.77 146.28,58.77 ; 124.4,64.81 124.4,67.291 ; 125.19,130.96 123,133.15 123,160.65 127.5,165.15 217.5,165.15 224,158.65 224,92.15 219,87.15 169,87.15 161.5,94.65 161.5,126.15 156.69,130.96 125.5,130.96 ; 125.235,149.46 130.202,149.46 ; 125.9,17.106 125.9,20.31 ; 125.9,24.665 125.9,20.31 ; 125.997,146.92 128,146.92 129.847,146.92 ; 126.422,105 129.5,105 ; 128,139.3 135.39,139.3 138.54,136.15 141.5,136.15 145.5,140.15 145.5,141.92 147,143.42 149.88,143.42 ; 128,149.46 128,151.941 ; 128.822,20.31 125.9,20.31 ; 129.5,101.796 129.5,105 ; 129.5,109.355 129.5,105 ; 132.422,105 129.5,105 ; 133.568,56.03 136.4,56.03 139.432,56.03 ; 140,138.14 140,138.298 142.422,140.72 140,140.72 ; 140,140.68 142.722,140.68 ; 146.28,53.43 148.9,50.81 ; 149.88,138.08 152.5,135.46 ; 151.938,50.81 153.4,50.81 155.769,50.81 ; 152.72,28.299 152.72,32.165 ; 155.538,135.46 157,135.46 159.369,135.46 ; 156.32,112.989 156.32,116.855 ; 159.322,44.31 161.9,44.31 ; 161.9,41.77 164.4,39.27 164.4,35.92 ; 161.9,50.53 161.9,44.31 ; 162.922,128.96 165.5,128.96 ; 164.4,44.31 161.9,44.31 ; 165.5,126.42 168,123.92 168,120.57 ; 165.5,135.18 165.5,128.96 ; 168,128.96 165.5,128.96 ; 170.094,7.116 170.094,12.504 ; 173.694,91.766 173.694,97.154 ; 175.482,7.116 176.788,5.81 208.594,5.81 211.9,9.116 211.9,10.633 ; 179.082,91.766 180.388,90.46 212.194,90.46 215.5,93.766 215.5,95.283 ; 181.97,7.422 181.97,12.81 ; 185.57,92.072 185.57,97.46 ; 187.3,7.48 187.3,11.579 188.531,12.81 ; 190.9,92.13 190.9,96.229 192.131,97.46 ; 193.92,7.422 193.92,12.81 ; 197.52,92.072 197.52,97.46 ; 199.308,7.422 199.308,11.636 200.481,12.81 ; 202.908,92.072 202.908,96.286 204.081,97.46 ; 207.71,46.19 209.24,46.19 211.9,48.85 215.9,48.85 ; 211.31,130.84 219.38,130.84 219.5,130.96 ; 211.9,10.31 211.9,19.137 210.4,20.637 210.4,43.31 213.4,46.31 215.9,46.31 ; 214,121 214,126.77 215.65,128.42 219.5,128.42 ; 214,121.15 214,105.287 215.5,103.787 215.5,94.96 ; 97,103.137 97,94.31 97,103.137

## Polygon pours and split planes (outlines as drawn)
12VGND on Top Layer "12VGND_L01_P000" (solid, pour order 0): 0,167 0.5,166.5 230.5,166.5 230.5,-0.5 231,-1 1.5,-1 1.5,166.5 1,167

## Other copper
Top Layer:
  rectangle net 12VGND: 137.529,55.065 139.629,57.122
  rectangle net 12VGND: 141.143,139.747 142.878,141.849
  rectangle net 12VGND: 141.5,139.747 143.5,142.166
  text "MOD2" at 151,114.42 h1.52
  text "MOD1" at 114,106.5 h1.52
  text "MOD3" at 138.4,23.5 h1.52
  text "MUM" at 105.5,23.195 h1.52

## Text inside footprints (layer, text, board x,y; h text height)
U5: Top Overlay "RS-12" at 51.65,121.695 h1.52
U6: Top Overlay "RS-12" at 54.728,36.53 h1.52
U7: Top Overlay "RS-12" at 63.6,121.585 h1.52
U8: Top Overlay "RS-12" at 63.81,154.73 h1.52
U9: Top Overlay "RS-12" at 66.678,36.42 h1.52
U10: Top Overlay "RS-12" at 66.888,69.565 h1.52
U11: Top Overlay "RS-12" at 75.55,121.585 h1.52
U12: Top Overlay "RS-12" at 75.731,154.73 h1.52
U13: Top Overlay "RS-12" at 78.628,36.42 h1.52
U14: Top Overlay "RS-12" at 78.81,69.565 h1.52
U15: Top Overlay "RS-12" at 87.5,121.235 h1.52
U16: Top Overlay "RS-12" at 87.5,154.73 h1.52
U17: Top Overlay "RS-12" at 90.578,36.07 h1.52
U18: Top Overlay "RS-12" at 90.578,69.565 h1.52
U23: Top Overlay "RS-12" at 166.55,37.695 h1.52
U24: Top Overlay "RS-12" at 170.15,122.345 h1.52
U25: Top Overlay "RS-12" at 178.5,37.585 h1.52
U26: Top Overlay "RS-12" at 178.71,70.73 h1.52
U27: Top Overlay "RS-12" at 182.1,122.235 h1.52
U28: Top Overlay "RS-12" at 182.31,155.38 h1.52
U29: Top Overlay "RS-12" at 190.45,37.585 h1.52
U30: Top Overlay "RS-12" at 190.631,70.73 h1.52
U31: Top Overlay "RS-12" at 194.05,122.235 h1.52
U32: Top Overlay "RS-12" at 194.231,155.38 h1.52
U33: Top Overlay "RS-12" at 202.4,37.235 h1.52
U34: Top Overlay "RS-12" at 202.4,70.73 h1.52
U35: Top Overlay "RS-12" at 206,121.885 h1.52
U36: Top Overlay "RS-12" at 206,155.38 h1.52